# Altium PCB Power.PcbDoc
Units mm, origin at the board's own origin, x right, y up, seen from the top; angles counter-clockwise.
Board outline 108 x 81.48 mm, 4 copper layers (Signal/Power1, GND Signal, GND Power, Signal/Power2), stack 1.56 mm thick; 99 components, 41 nets, 256 pads, 6 vias.
Unrouted connection lines stored in the file: 3.
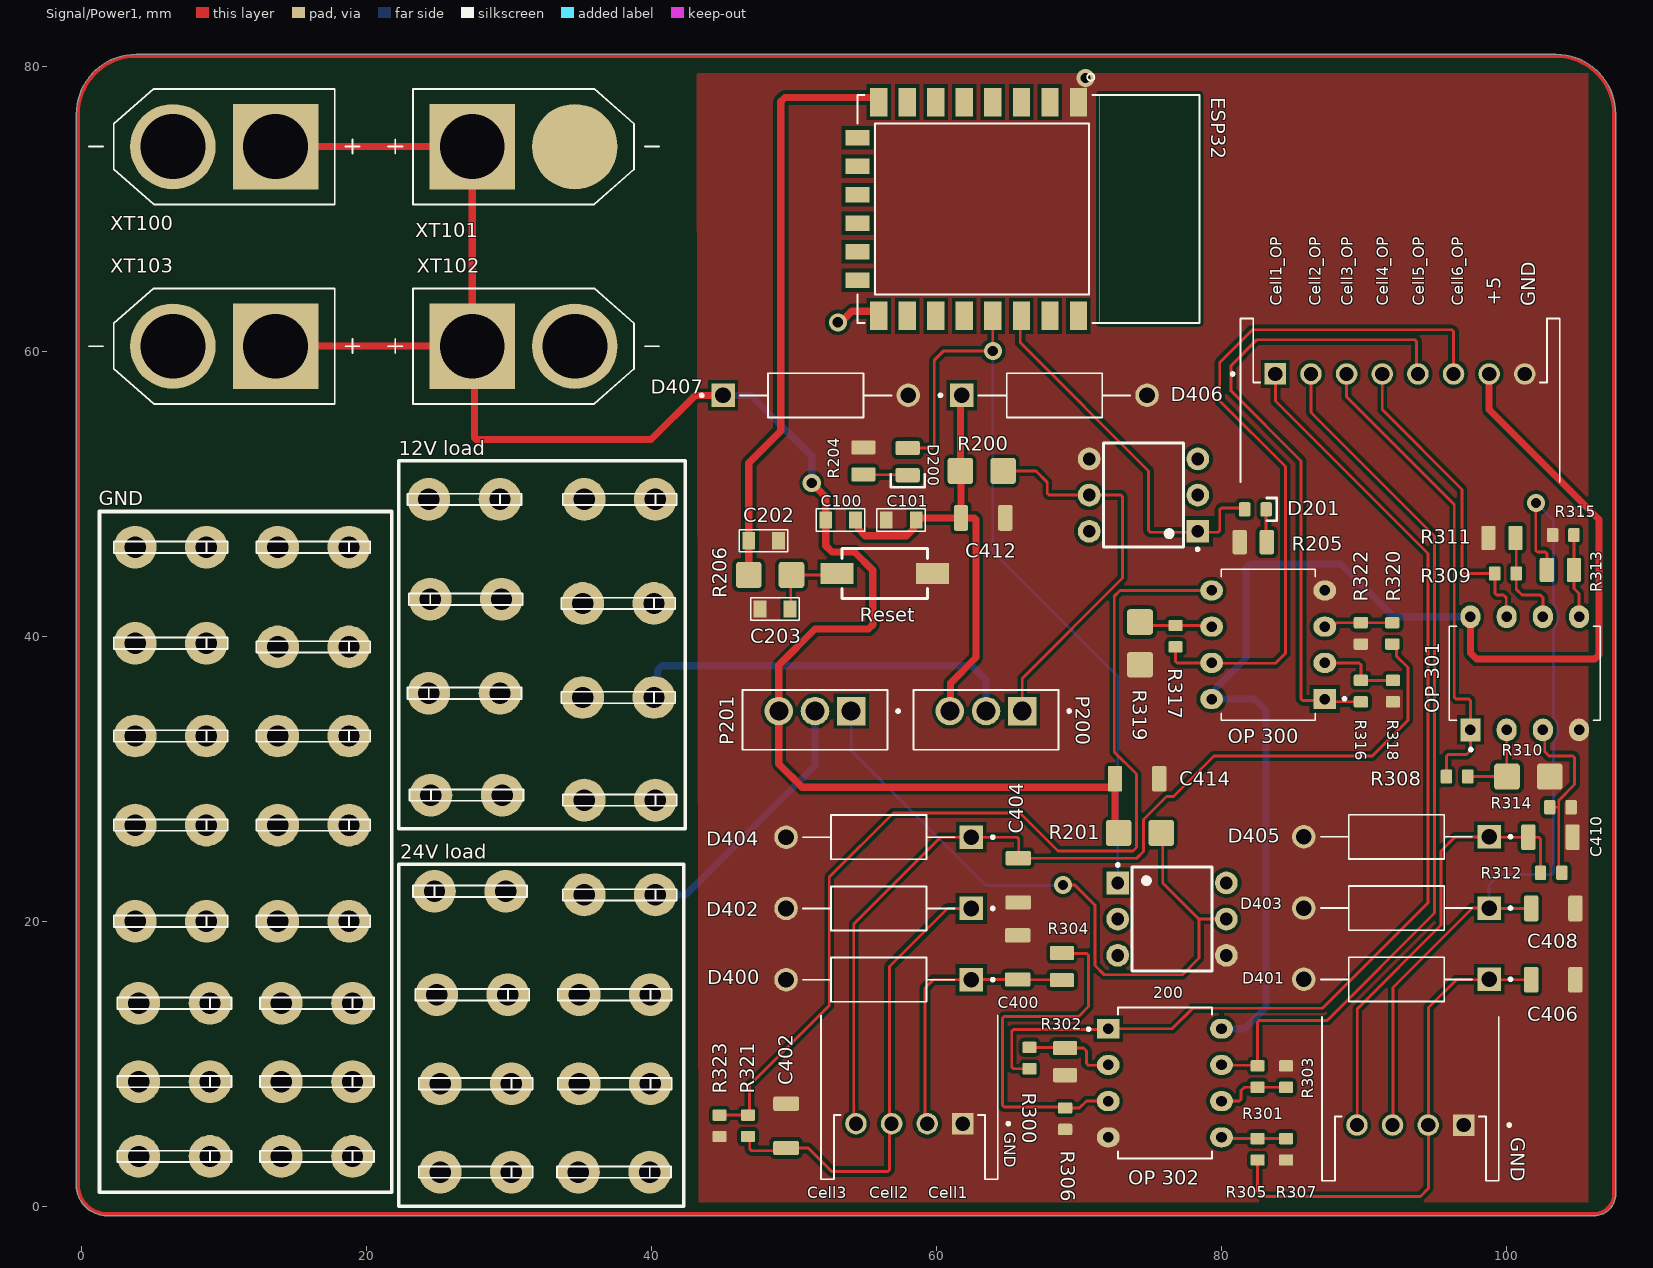
[diagram p0: Signal/Power1 view]
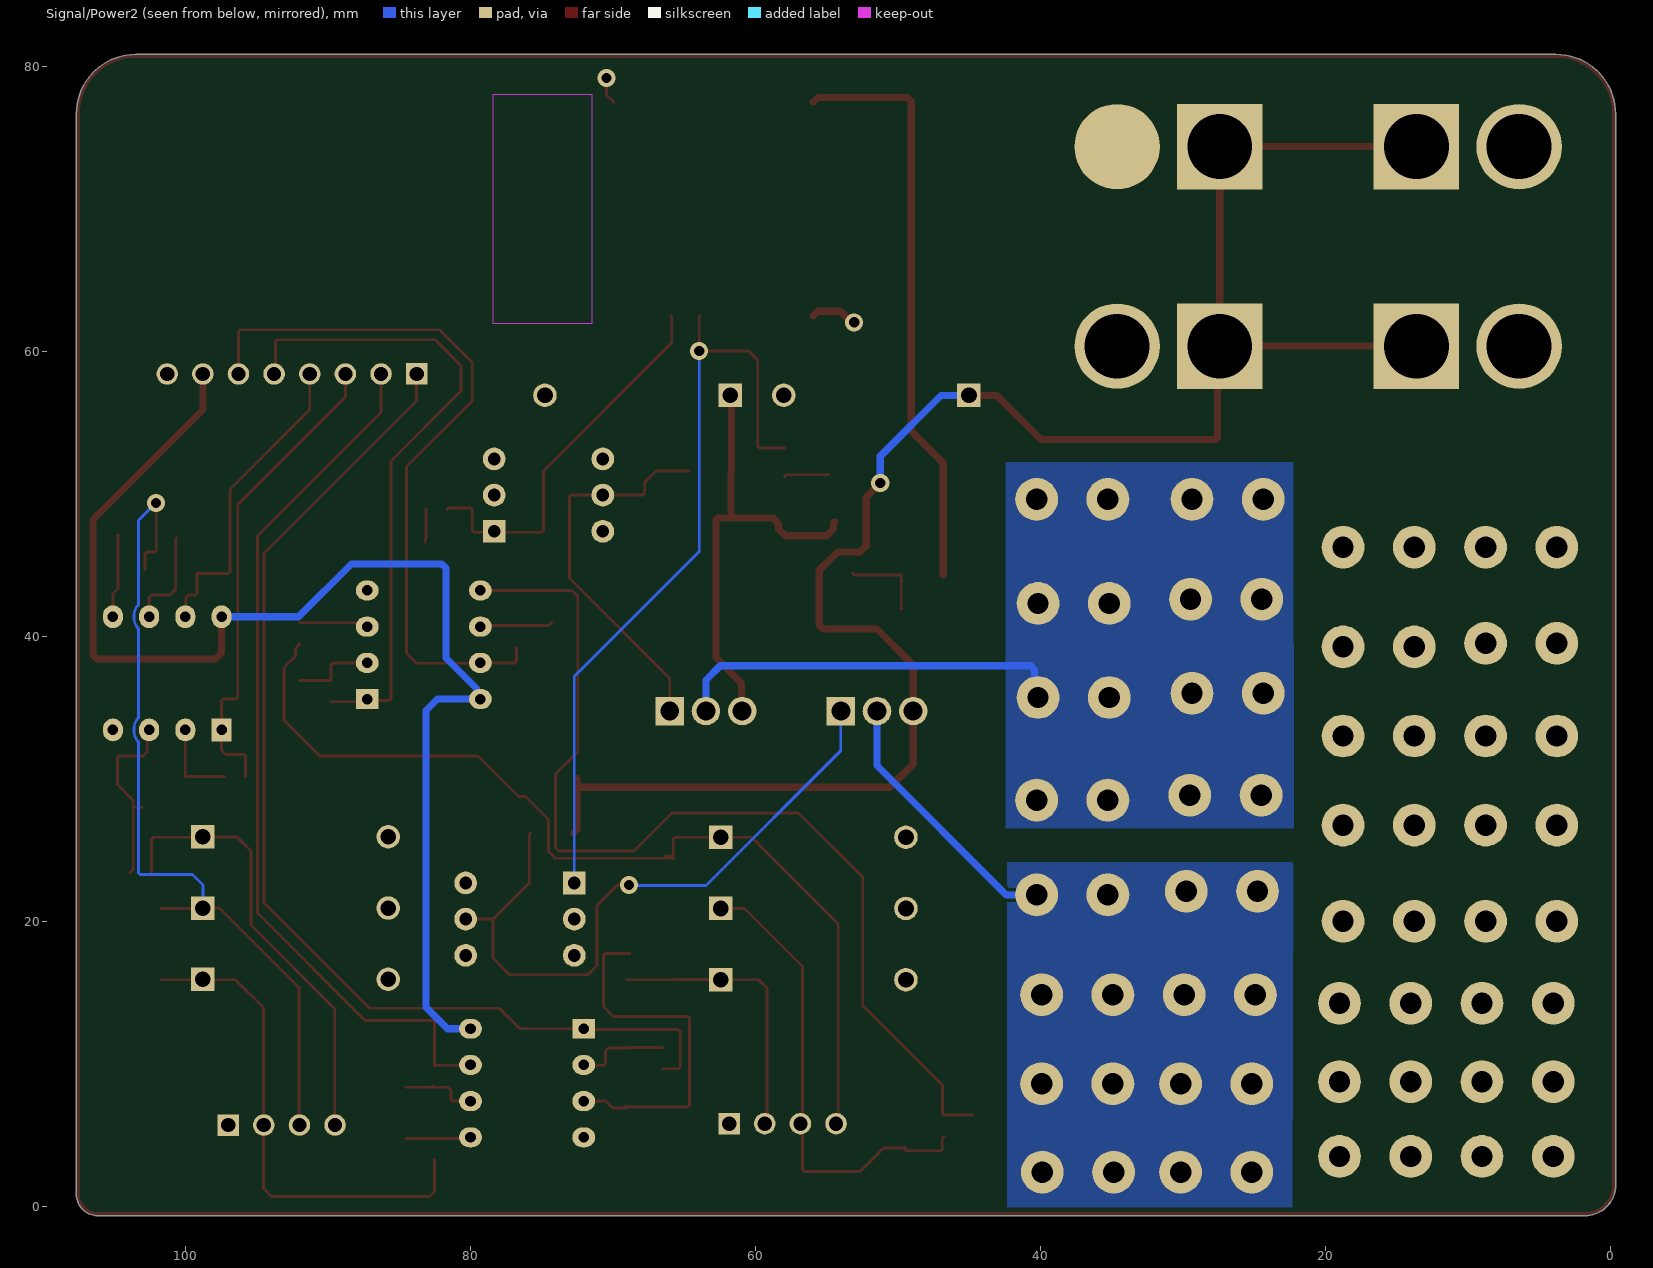
[diagram p1: Signal/Power2 view, seen from below]
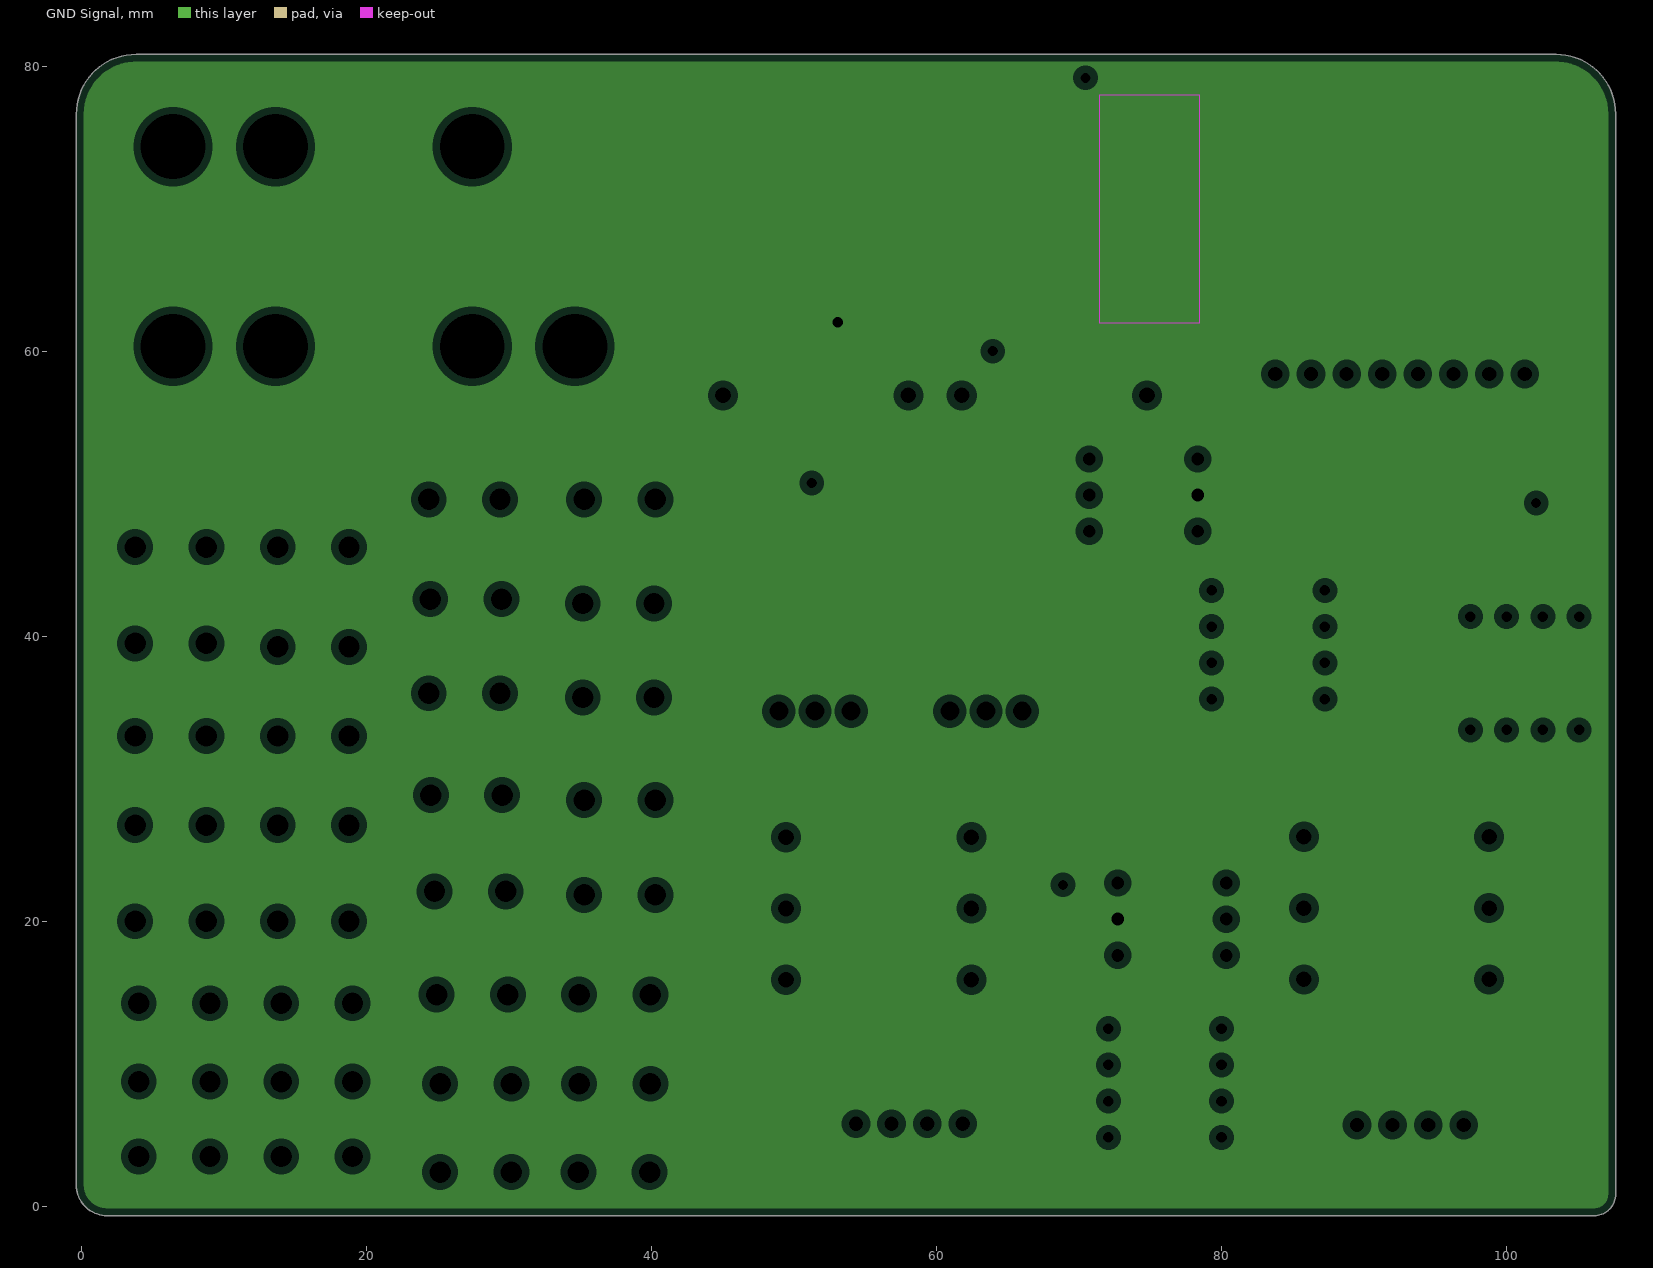
[diagram p2: GND Signal, clearances drawn from the general rule]
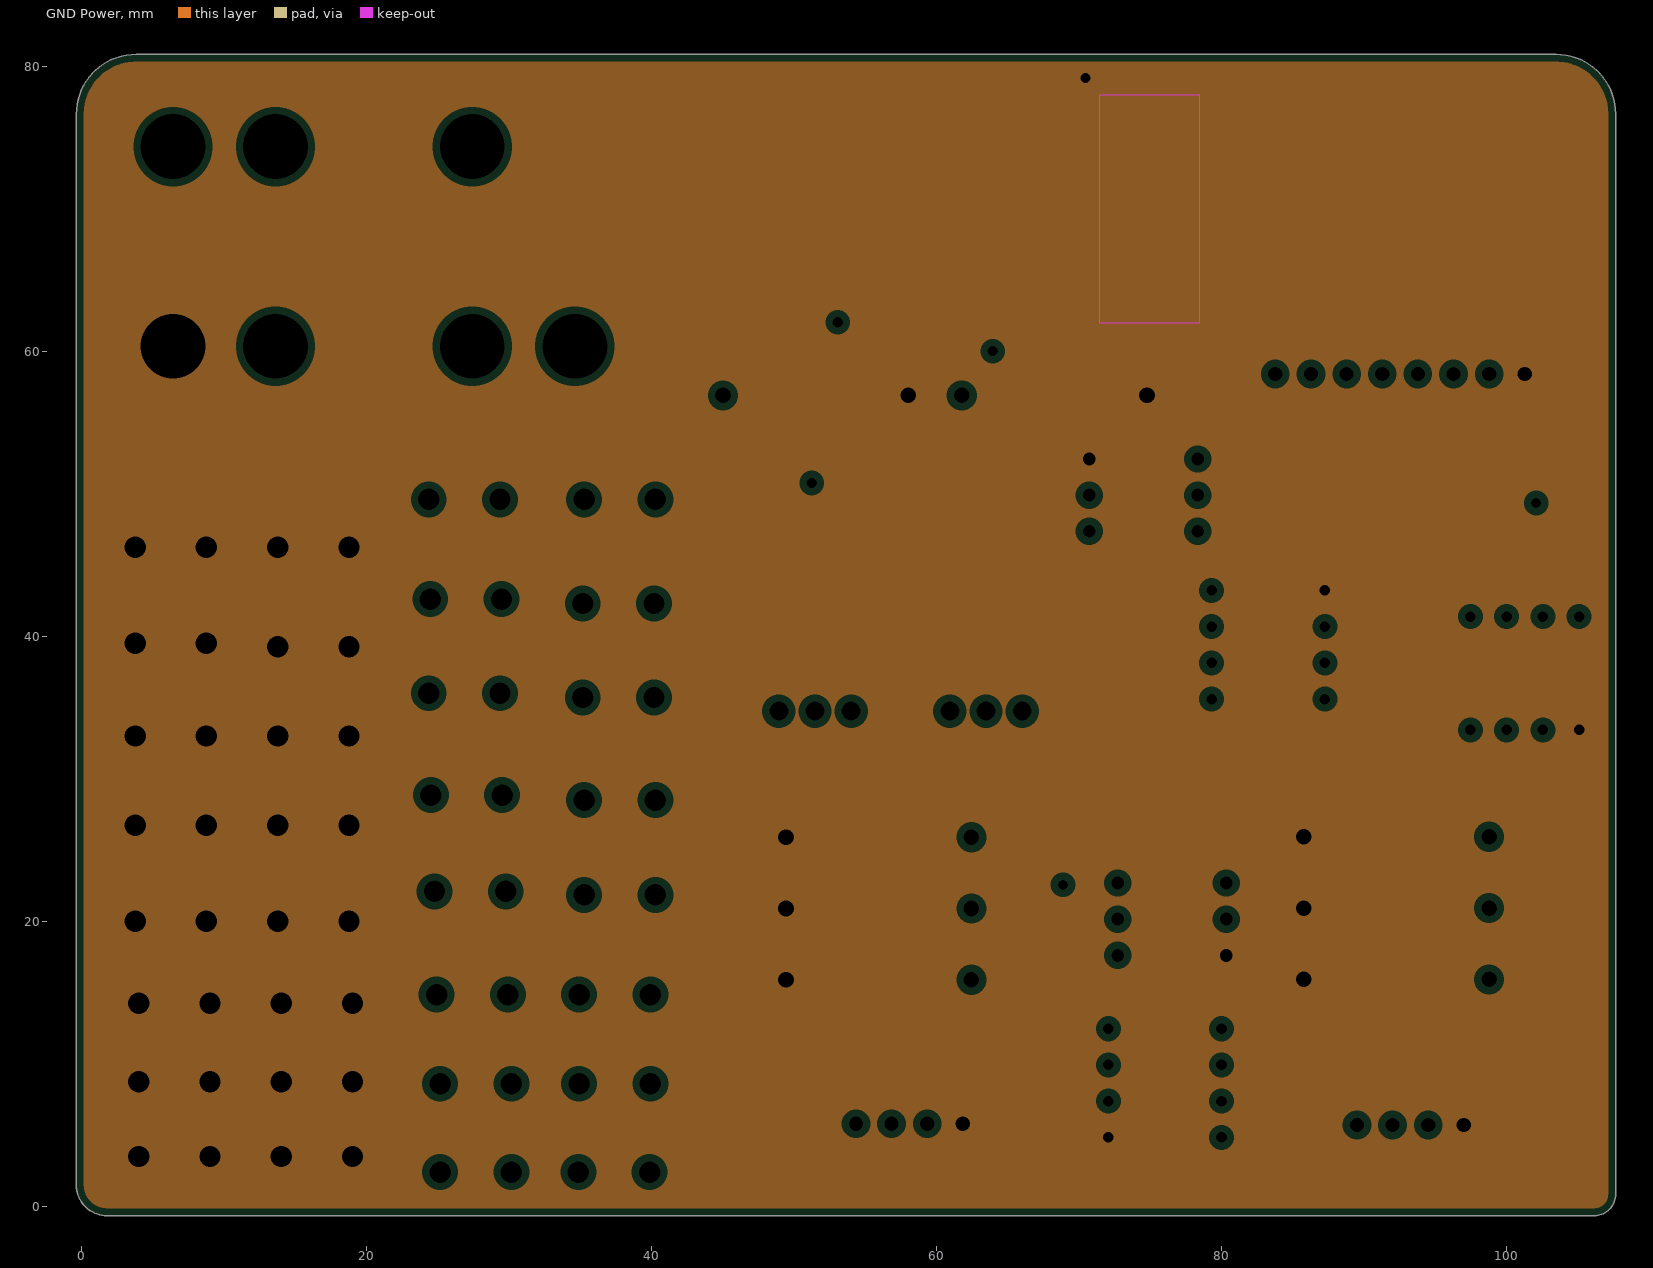
[diagram p3: GND Power, clearances drawn from the general rule]
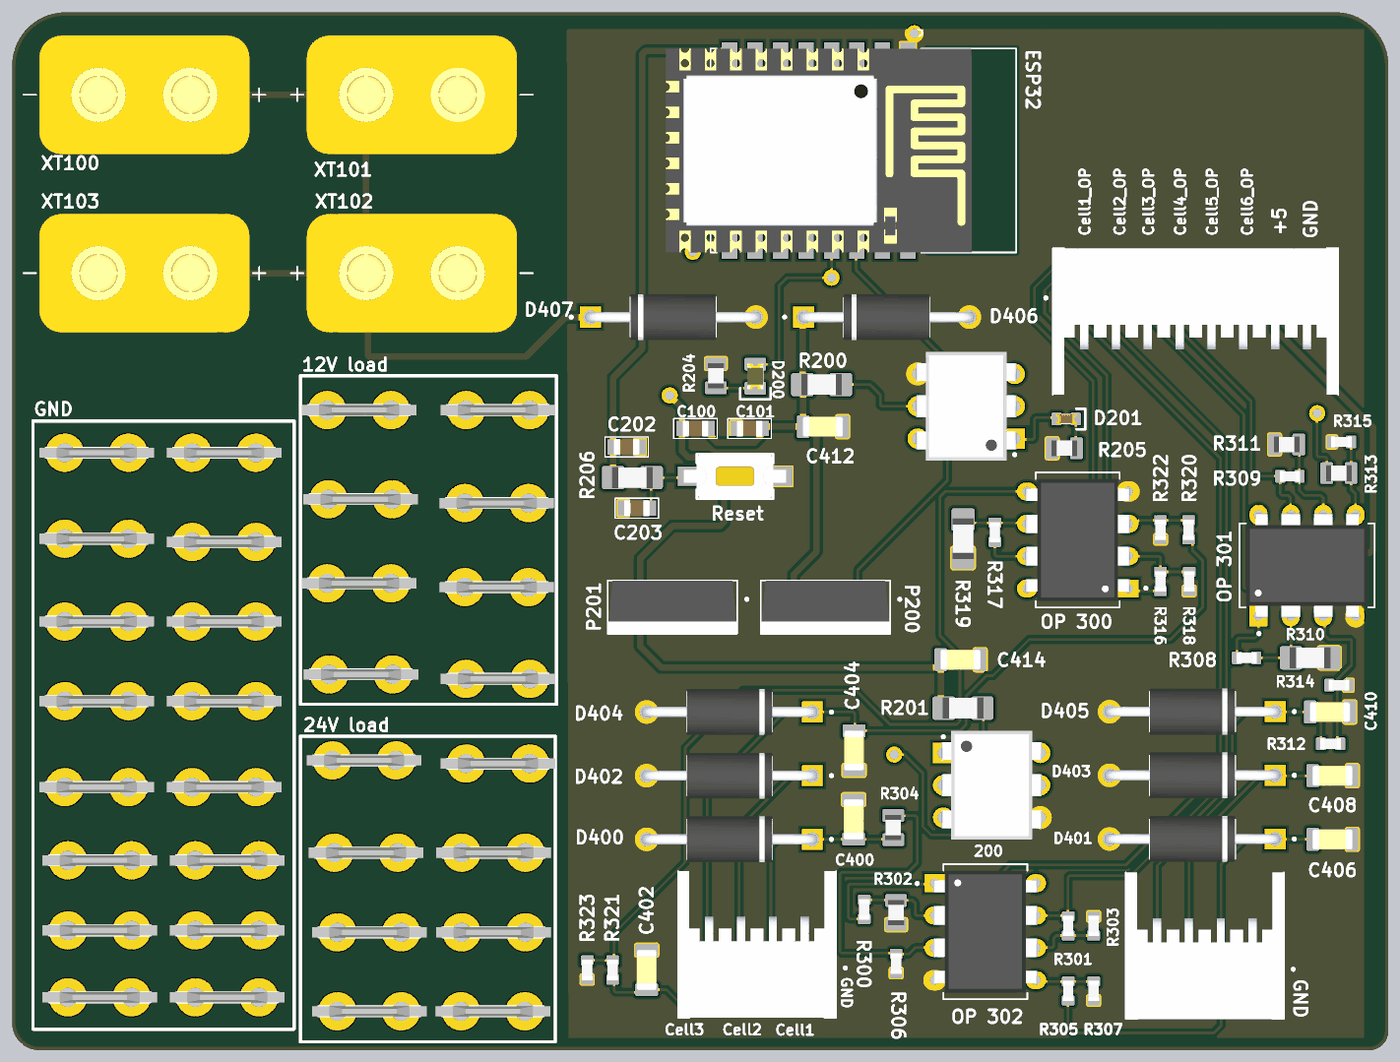
[diagram p4: 3D render of the assembled board from above, using the file's embedded part models]

## Layer stack, top to bottom
Top Solder: solder mask 0.0254, SM-001, Dk 4
Signal/Power1: signal copper 0.035
PP1_2116: prepreg 0.11, PP-017, Dk 4.29
GND Signal: plane copper 0.035, net Signal_GND
C_FR4: core 1.2, Core-039, Dk 4.6
GND Power: plane copper 0.035, net gnd
PP2_2116: prepreg 0.11, PP-017, Dk 4.29
Signal/Power2: signal copper 0.035
Bottom Solder: solder mask 0.0254, SM-001, Dk 4

## Board outline
1.775,-0.652 cw(c1.775,1.5) -0.377,1.5 -0.377,76.632 cw(c3.818,76.632) 3.818,80.827 103.442,80.827 cw(c103.442,76.642) 107.627,76.642 107.627,0.85 cw(c106.125,0.85) 106.125,-0.652

## Design rules (kind name [scope] priority, off if disabled: settings)
Clearance [All] p1: gap=0.254 ignorepadtopadclearanceinfootprint=FALSE
PlaneClearance [All] p1: clearance=0.508
PlaneConnect [All] p1: planeconnectstyle=Relief reliefexpansion=0.508 reliefentries=4 reliefconductorwidth=0.254 reliefairgap=0.254
PolygonConnect PolygonConnect_1 [All vs IsNamedPolygon('NONET_L-01_P-001')] p1: connectstyle=Direct reliefconductorwidth=0.254 reliefentries=4 polygonreliefangle="90 Angle" airgapwidth=0.254
PolygonConnect [All] p2: connectstyle=Relief reliefconductorwidth=0.254 reliefentries=4 polygonreliefangle="90 Angle" airgapwidth=0.254
RoutingVias [All] p1: holewidth=0.3 width=0.7 viastyle="Through Hole" minholewidth=0.25 minwidth=0.6 maxholewidth=0.3 maxwidth=0.7
SolderMaskExpansion [All] p1: expansion=0.102 istentingtop=FALSE
Width [All] p1: maxlimit=0.5 minlimit=0.15 preferedwidth=0.2
28 further rules are at their usual default settings.

## Classes and differential pairs
component class U_4_Protection: C400 C402 C404 C406 C408 C410 C412 C414 D400 D401 D402 D403 D404 D405 D406 D407
component class U_3_BMS: Cell3 GND "OP 300" "OP 301" "OP 302" R300 R301 R302 R303 R304 R305 R306 R307 R308 R309 R310 R311 R312 R313 R314 R315 R316 R317 R318 R319 R320 R321 R322 R323
component class U_2_CircuitBreaker: 200 C202 C203 D200 D201 P200 P201 R200 R201 R204 R205 R206 Reset
component class U_1_Power: C100 C101 XT100 XT101 XT102 XT103

## Components (designator, comment, footprint, x,y, rotation, side; value= is the part's Value field where it differs from the comment)
200 "Optocoupler_4n25" Optocoupler_4n25 76.5,20.15 r0 top (schematic designator *200)
* "Optocoupler_4n25" Optocoupler_4n25 74.5,49.9 r180 top
C100 "100n" C0805 53.25,48.15 r0 top
C101 "100n" C0805 57.5,48.15 r0 top
C202 "100n" C0805 47.85,46.7 r180 top
C203 "100n" C0805 48.65,41.9 r180 top
C400 "2u2" CAP_1206 65.665,17.465 r270 top
C402 "2u2" CAP_1206 49.42,5.65 r270 top
C404 "2u2" CAP_1206 65.7,22.875 r90 top
C406 "2u2" CAP_1206 103.25,15.9 r180 top
C408 "2u2" CAP_1206 103.25,20.9 r180 top
C410 "2u2" CAP_1206 103.05,25.9 r180 top
C412 "2u2" CAP_1206 63.25,48.3 r180 top
C414 "2u2" CAP_1206 74.05,30 r180 top
Cell3 "S4B-XH-A-1" JST_S4B-XH-A-1 58.075,7.65 r180 top (schematic designator J300)
D200 "GREEN" LED_0805_GREEN 57.95,52.25 r90 top
D201 "RED" LED_0603_RED 82.35,48.9 r180 top
D400 "TVS-P6KE400A" TVS 55.92,15.9 r180 top
D401 "TVS-P6KE400A" TVS 92.25,15.925 r180 top
D402 "TVS-P6KE400A" TVS 55.92,20.9 r180 top
D403 "TVS-P6KE400A" TVS 92.25,20.925 r180 top
D404 "TVS-P6KE400A" TVS 55.92,25.9 r180 top
D405 "TVS-P6KE400A" TVS 92.25,25.925 r180 top
D406 "TVS-P6KE400A" TVS 68.25,56.9 r0 top
D407 "TVS-P6KE400A" TVS 51.5,56.9 r0 top
ESP32 "ESP8266-12E/ESP-12E" XCVR_ESP8266-12E/ESP-12E 62.925,69.975 r270 top (schematic designator U200)
GND "S8B-XH-A-1" JST_S8B-XH-A-1 92.5,56.55 r0 top (schematic designator J302)
GND "S4B-XH-A-1" JST_S4B-XH-A-1 93.225,7.55 r180 top (schematic designator J301)
"OP 300" "Opamp_TL072" TL072 83.25,39.4 r180 top
"OP 301" "Opamp_TL072" TL072 101.25,37.4 r90 top
"OP 302" "Opamp_TL072" TL072 76,8.65 r0 top
P200 "P Mosfet" Mosfet 63.45,34.75 r180 top
P201 "P Mosfet" Mosfet 51.45,34.75 r180 top
R200 "10K" RES_1206 63.15,51.6 r0 top
R201 "10K" RES_1206 74.25,26.2 r0 top
R204 "270" RES_0805 54.85,52.3 r90 top
R205 "270" RES_0805 82.2,46.6 r180 top
R206 "10K" RES_1206 48.3,44.3 r180 top
R300 "220K" RES_0603 66.5,10.4 r270 top
R301 "220K" RES_0603 82.5,9.1 r90 top
R302 "470K" RES_0805 69,10.15 r90 top
R303 "680K" RES_0603 84.5,9.1 r90 top
R304 "470K" RES_0805 68.775,16.825 r90 top
R305 "680K" RES_0603 82.5,4 r270 top
R306 "220K" RES_0603 69,6.15 r90 top
R307 "220K" RES_0603 84.5,4 r90 top
R308 "220K" RES_0603 96.5,30.15 r180 top
R309 "220K" RES_0603 99.9,44.4 r180 top
R310 "100K" RES_1206 101.5,30.15 r180 top
R311 "470K" RES_0805 99.65,46.9 r0 top
R312 "3K9" RES_0603 103.1,23.4 r0 top
R313 "470K" RES_0805 103.75,44.65 r0 top
R314 "220K" RES_0603 103.75,28 r180 top
R315 "220K" RES_0603 103.95,47.1 r0 top
R316 "220K" RES_0603 89.75,36.15 r270 top
R317 "220K" RES_0603 76.75,40 r270 top
R318 "680K" RES_0603 92,36.15 r270 top
R319 "100K" RES_1206 74.25,39.5 r90 top
R320 "680K" RES_0603 91.95,40.2 r270 top
R321 "3K9" RES_0603 46.75,5.65 r90 top
R322 "220K" RES_0603 89.75,40.2 r90 top
R323 "220K" RES_0603 44.75,5.65 r90 top
Reset "" 434121043816 56.35,44.4 r0 top (schematic designator SW200)
T100 "Terminal pin 6.3mm" "Terminal pin 6.3mm" 37.75,49.6 r180 top
T101 "Terminal pin 6.3mm" "Terminal pin 6.3mm" 37.4,8.6 r180 top
T102 "Terminal pin 6.3mm" "Terminal pin 6.3mm" 27.65,8.6 r180 top
T103 "Terminal pin 6.3mm" "Terminal pin 6.3mm" 27.4,14.85 r180 top
T104 "Terminal pin 6.3mm" "Terminal pin 6.3mm" 37.35,2.4 r180 top
T105 "Terminal pin 6.3mm" "Terminal pin 6.3mm" 27.65,2.4 r180 top
T106 "Terminal pin 6.3mm" "Terminal pin 6.3mm" 37.4,14.85 r180 top
T109 "Terminal pin 6.3mm" "Terminal pin 6.3mm" 26.85,49.6 r180 top
T112 "Terminal pin 6.3mm" "Terminal pin 6.3mm" 27,28.85 r0 top
T113 "Terminal pin 6.3mm" "Terminal pin 6.3mm" 27.25,22.1 r0 top
T115 "Terminal pin 6.3mm" "Terminal pin 6.3mm" 26.95,42.6 r0 top
T116 "Terminal pin 6.3mm" "Terminal pin 6.3mm" 26.85,36 r0 top
T118 "Terminal pin 6.3mm" "Terminal pin 6.3mm" 37.65,35.7 r180 top
T119 "Terminal pin 6.3mm" "Terminal pin 6.3mm" 37.65,42.3 r180 top
T121 "Terminal pin 6.3mm" "Terminal pin 6.3mm" 37.75,28.5 r180 top
T122 "Terminal pin 6.3mm" "Terminal pin 6.3mm" 37.75,21.85 r180 top
T124 "Terminal pin 6.3mm" "Terminal pin 6.3mm" 16.25,20 r180 top
T125 "Terminal pin 6.3mm" "Terminal pin 6.3mm" 6.5,14.25 r180 top
T126 "Terminal pin 6.3mm" "Terminal pin 6.3mm" 16.25,26.75 r180 top
T127 "Terminal pin 6.3mm" "Terminal pin 6.3mm" 6.25,39.5 r180 top
T128 "Terminal pin 6.3mm" "Terminal pin 6.3mm" 6.25,46.25 r180 top
T129 "Terminal pin 6.3mm" "Terminal pin 6.3mm" 16.5,3.5 r180 top
T129 "Terminal pin 6.3mm" "Terminal pin 6.3mm" 16.5,8.75 r180 top
T130 "Terminal pin 6.3mm" "Terminal pin 6.3mm" 6.5,3.5 r180 top
T130 "Terminal pin 6.3mm" "Terminal pin 6.3mm" 6.5,8.75 r180 top
T131 "Terminal pin 6.3mm" "Terminal pin 6.3mm" 6.25,33 r180 top
T132 "Terminal pin 6.3mm" "Terminal pin 6.3mm" 6.25,26.75 r180 top
T133 "Terminal pin 6.3mm" "Terminal pin 6.3mm" 6.25,20 r180 top
T134 "Terminal pin 6.3mm" "Terminal pin 6.3mm" 16.5,14.25 r180 top
T135 "Terminal pin 6.3mm" "Terminal pin 6.3mm" 16.25,46.25 r180 top
T136 "Terminal pin 6.3mm" "Terminal pin 6.3mm" 16.25,39.25 r180 top
T137 "Terminal pin 6.3mm" "Terminal pin 6.3mm" 16.25,33 r180 top
XT100 "XT60-Male" XT60-Male#1 10,74.35 r180 top
XT101 "XT60-Male" XT60-Male#2 31,74.35 r0 top
XT102 "XT60-Male" XT60-Male#1 31,60.35 r0 top
XT103 "XT60-Male" XT60-Male#1 10,60.35 r180 top

## Footprints (in the part's own frame and the unit in brackets; to place one, negate y for a bottom-side part, rotate by r counter-clockwise, add the part's x,y. Pads: shape width x height; smd on the part's side, far side on the other; paste and mask are expansions set on the pad)
434121043816 [mm] "SMD Tact Switch, body 6x3.5mm"
  rect 2.3x1.5 smd: 1(-3.35,0) 2(3.35,0)
  silkscreen extent -3,-1.75 3,1.75, body extent -4,-1.75 4,1.75, height 4.3
C0805 [mm]
  rect 0.9x1.2 smd: 1(-1.05,0) 2(1.05,0)
  silkscreen extent -1.7,-0.79 1.7,0.79, body extent -1,-0.63 1,0.63, height 1.36
CAP_1206 [mm]
  rrect25% 1x1.8 smd: 1(-1.55,0) 2(1.55,0)
  body extent -1.6,-0.8 1.6,0.8, height 0.94
JST_S4B-XH-A-1 [mm]
  rect 1.508x1.508 / inner round 1.508 / far side rect 1.508x1.508 hole 1: 1(-3.75,1.85)
  round 1.508 hole 1: 2(-1.25,1.85) 3(1.25,1.85) 4(3.75,1.85)
  silkscreen extent -7.04,-5.75 6.2,5.75, body extent -6.2,-5.75 6.2,5.75, height 6.1
JST_S8B-XH-A-1 [mm]
  rect 1.508x1.508 / inner round 1.508 / far side rect 1.508x1.508 hole 1: 1(-8.75,1.85)
  round 1.508 hole 1: 2(-6.25,1.85) 3(-3.75,1.85) 4(-1.25,1.85) 5(1.25,1.85) 6(3.75,1.85) 7(6.25,1.85) 8(8.75,1.85)
  silkscreen extent -11.85,-5.75 11.2,5.75, body extent -11.2,-5.75 11.2,5.75, height 6.1
LED_0603_RED [mm]
  rrect25% 0.8x1 smd: A(0.75,0) K(-0.75,0)
  silkscreen extent -1.5,-0.8 -0.8,0.8, body extent -0.8,-0.4 0.8,0.4, height 0.6
LED_0805_GREEN [mm]
  rrect25% 1x1.7 smd: A(0.95,0) K(-0.95,0)
  silkscreen extent -1.8,-1.2 -0.9,1.2, body extent -1,-0.63 1,0.63, height 1.12
Mosfet [mm]
  rect 2x2 / inner round 2 / far side rect 2x2 hole 1.33: 1(-2.54,0)
  round 2 hole 1.33: 2(0,0) 3(2.54,0)
  silkscreen extent -5.93,-1.48 5.08,2.72, body extent -5.08,-1.47 5.08,2.72, height 20.56
Optocoupler_4n25 [mm]
  rect 1.6x1.6 hole 0.9: 1(-3.81,2.54)
  round 1.6 hole 0.9: 2(-3.81,0) 3(-3.81,-2.54) 4(3.81,-2.54) 5(3.81,0) 6(3.81,2.54)
  silkscreen extent -3.9,-3.65 2.8,3.9, body extent -3.94,-4.26 3.94,4.26, height 3.54
RES_0603 [mm]
  rrect25% 0.8x1 smd: 1(-0.75,0) 2(0.75,0)
  body extent -0.8,-0.43 0.8,0.43, height 0.52
RES_0805 [mm]
  rrect25% 1x1.7 smd: 1(-0.95,0) 2(0.95,0)
  body extent -1,-0.63 1,0.63, height 0.47
RES_1206 [mm]
  rrect25% 1.8x1.84 smd: 1(-1.5,0) 2(1.5,0)
  body extent -1.6,-0.83 1.6,0.83, height 0.57
"Terminal pin 6.3mm" [mm]
  round 3 hole 1.5: 1(-2.5,0) 2(2.5,0)
  silkscreen extent -4,-0.4 4,0.4, body extent -4.5,-0.4 4.5,0.4, height 10
TL072 [mm]
  rect 1.6x1.4 hole 0.74: 1(-3.97,3.81)
  oval 1.6x1.4 hole 0.74: 2(-3.97,1.27) 3(-3.97,-1.27) 4(-3.97,-3.81) 5(3.97,-3.81) 6(3.97,-1.27) 7(3.97,1.27) 8(3.97,3.81)
  silkscreen extent -5.45,-5.3 3.3,5.3, body extent -4.1,-4.79 4.1,4.79, height 4.58
TVS [mm]
  round 1.65 hole 1.1: A(6.5,0)
  rect 1.65x1.65 / inner round 1.65 / far side rect 1.65x1.65 hole 1.1: C(-6.5,0)
  silkscreen extent -8.1,-1.55 5.32,1.55, body extent -6.9,-1.8 6.9,1.8, height 3.6
XCVR_ESP8266-12E/ESP-12E [mm]
  rect 2x1.2 smd: 1(-7.5,7) 2(-7.5,5) 3(-7.5,3) 4(-7.5,1) 5(-7.5,-1) 6(-7.5,-3) 7(-7.5,-5) 8(-7.5,-7) 15(7.5,-7) 16(7.5,-5) 17(7.5,-3) 18(7.5,-1) 19(7.5,1) 20(7.5,3) 21(7.5,5) 22(7.5,7)
  rect 1.1x1.7 smd: 9(-5,-8.5) 10(-3,-8.5) 11(-1,-8.5) 12(1,-8.5) 13(3,-8.5) 14(5,-8.5)
  Keep-Out Layer region: 8,8.51 -8.009,8.51 -8.009,15.5 8,15.5
  Keep-Out Layer region: 8,8.51 -8.009,8.51 -8.009,15.5 8,15.5
  silkscreen extent -9.5,-8.5 8,15.5, body extent -8,-12 8,12, height 3
XT60-Male#1 [mm]
  round 6 hole 4.55: N(3.6,0)
  rect 6x6 / inner round 6 / far side rect 6x6 hole 4.55: P(-3.6,0)
  silkscreen extent -9.5,-4.05 9.5,4.05, body extent -8.25,-4.65 8.25,4.65, height 15.8
XT60-Male#2 [mm]
  round 6 all layers, no hole: N(3.6,0)
  rect 6x6 / inner round 6 / far side rect 6x6 hole 4.55: P(-3.6,0)
  silkscreen extent -9.5,-4.05 9.5,4.05, body extent -8.25,-4.65 8.25,4.65, height 15.8

## Part data
C100 C101 C202 C203: library part C0805
C400 C402 C404 C406 C408 C410 C412 C414: library part CAP_1206, "Capacitor SMD 1206"
Cell3 GND: "Connector Header Through Hole, Right Angle 4 position 0.098 (2.50mm)", Package=None, Check_prices=https://www.snapeda.com/parts/S4B-XH-A-1/JST+Sales+America+Inc./view-part/?ref=eda, MF="JST Sales", MP=S4B-XH-A-1, SnapEDA_Link=https://www.snapeda.com/parts/S4B-XH-A-1/JST+Sales+America+Inc./view-part/?ref=snap
D200: library part LED_0805_GREEN, "LED 0805 GREEN SMD"
D201: library part LED_0603_RED, "LED 0603 RED SMD"
ESP32: "This WiFi module has a 32-bit MCU micro and clock speeds supporting 80 MHz or 160 MHz. Supports the RTOS and integrated Wi-Fi MAC/BB/RF/PA/LNA, and has an on-board antenna.", Package=None, Availability="Not in stock", Check_prices=https://www.snapeda.com/parts/ESP8266-12E/ESP-12E/AI-Thinker/view-part/?ref=eda, MF=AI-Thinker, MP=ESP8266-12E/ESP-12E, Price=None, SnapEDA_Link=https://www.snapeda.com/parts/ESP8266-12E/ESP-12E/AI-Thinker/view-part/?ref=snap
GND: "Connector Header Through Hole, Right Angle 8 position 0.098 (2.50mm)", Package=None, Check_prices=https://www.snapeda.com/parts/S8B-XH-A-1/JST+Sales+America+Inc./view-part/?ref=eda, MF="JST Sales", MP=S8B-XH-A-1, SnapEDA_Link=https://www.snapeda.com/parts/S8B-XH-A-1/JST+Sales+America+Inc./view-part/?ref=snap
R200 R201 R206 R310 R319: library part RES_1206, "Resistor SMD 1206"
R204 R205 R302 R304 R311 R313: library part RES_0805, "Resistor SMD 0805"
R300 R301 R303 R305 R306 R307 R308 R309 R312 R314 R315 R316 R317 R318 R320 R321 R322 R323: library part RES_0603, "Resistor SMD 0603"
Reset: library part CMP-1459-00005-3, "Switch Tactile Spst-no 0.05A 12V", Contact Current Rating=50mA, Contact Resistance=100mΩ, Insulation Resistance=100MΩ, Max Operating Temperature=85°C, Min Operating Temperature=-40°C, Operating Force=160N, Voltage Rating=12V, Contact Plating=Silver, Current Rating=50mA, Height=4.3mm, Packaging="Tape and Reel", RoHS=Compliant, Width=6mm
XT100 XT101 XT102 XT103: "Plug; DC supply; XT60; male; PIN: 2; for cable; soldered; 30A; 500V", Package=Package, Availability="Not in stock", Check_prices=https://www.snapeda.com/parts/XT60-M/AMASS/view-part/?ref=eda, MF=AMASS, MP=XT60-M, Price=None, SnapEDA_Link=https://www.snapeda.com/parts/XT60-M/AMASS/view-part/?ref=snap

## Via types
v1: diameter 1.27, hole 0.711, Signal/Power1 to Signal/Power2, 6 vias

## Nets (pads, with @x,y where several pads share a name; then routed paths per layer and width w, separated by ;. In a path a pad name is that pad's centre, name@x,y a point inside that pad or via, vN(x,y) a via of type N, cw(c..) or ccw(c..) an arc to the next point about the centre after c; other vN are vias at no path point)
12V_Signal: *.1 D201.A ESP32.20 | length 27.2
  Signal/Power1 w0.2: ESP32.20 65.85,62.4 65.85,60.6 74.85,51.6 74.85,47.417 74.967,47.3 *.1@78.31,47.3 ; *.1@78.38,47.29 79.733,47.29 79.85,47.407 79.85,48.883 79.967,49 81.5,49 D201.A
24V_Signal: 200.1 D200.A ESP32.19 | length 55.3
  Signal/Power1 w0.2: D200.A 59.7,53.2 59.817,53.317 59.817,59.367 60.45,60 v1(63.925,60) ; v1@63.925,60.592 ESP32.19
  Signal/Power2 w0.2: v1@63.85,60.1 63.925,60.025 v1(63.925,60) 63.925,45.933 72.69,37.168 200.1
+3V3: C202.2 ESP32.8 R206.2 | length 41.2
  Signal/Power1 w0.5: R206.2 C202.2 ; C202.2@46.8,46.775 46.8,52.15 49.05,54.4 49.05,77.507 49.343,77.8 55.6,77.8 ESP32.8
+5: "OP 300.8" "OP 301.8" "OP 302.8" GND.7 | length 91
  Signal/Power1 w0.2: 97.44,41.29 97.45,41.3
  Signal/Power1 w0.5: 97.44,41.29 97.44,38.827 97.867,38.4 106.157,38.4 106.45,38.693 106.45,48.2 98.75,55.9 GND.7
  Signal/Power2 w0.5: 79.97,12.46 81.585,12.46 83.09,13.965 83.09,34.785 82.285,35.59 79.28,35.59 79.552,35.862 79.552,36.327 81.7,38.475 81.7,44.782 81.993,45.075 88.325,45.075 92.03,41.37 97.44,41.37
+12_unfiltered: C100.2 C101.2 C412.2 D406.C P200.3 R200.1 | length 32.7
  Signal/Power1 w0.2: C100.2 C100.2@54.45,48 ; C101.2 C101.2@58.7,48.3
  Signal/Power1 w0.5: C100.2@54.45,48 54.5,47.95 54.5,47.518 54.972,47.046 57.878,47.046 58.35,47.518 58.35,47.9 C101.2@58.55,48.1 ; C101.2@58.7,48.3 C412.2 ; P200.3@60.95,34.8 60.95,36.7 62.75,38.5 62.75,48.183 62.633,48.3 C412.2 ; D406.C 61.65,56.8 R200.1 61.7,51.55 C412.2
+12V_Load: P200.2 T100.1 T100.2 T109.1 T109.2 T112.1 T112.2 T115.1 T115.2 T116.1 T116.2 T118.1 T118.2 T119.1 T119.2 T121.1 T121.2 | length 28.2
  Signal/Power2 w0.2: P200.2@63.1,35.1 P200.2@63.5,35.1
  Signal/Power2 w0.5: T118.1 40.392,35.942 40.392,37.64 40.685,37.933 62.442,37.933 63.45,36.925 63.45,35.1 P200.2
+24_unfiltered: C100.1 C414.2 D407.C P201.3 R201.1 XT100.N XT100.P XT101.P XT102.N XT102.P XT103.P | length 132.3
  Signal/Power1 w0.2: XT103.P@13.65,60.1 XT103.P@13.9,60.35 ; XT100.P@13.85,74.1 XT100.P@14.1,74.35 ; XT102.P@27.15,60.2 XT102.P@27.55,59.8 ; XT101.P@27.4,73.95 XT101.P@27.45,74 ; R201.1@72.6,26.55 72.75,26.4 R201.1
  Signal/Power1 w0.5: XT103.P@13.9,60.35 XT102.P XT101.P@27.4,73.95 ; XT100.P@14.1,74.35 XT101.P ; XT102.P@27.55,59.8 27.55,53.917 27.667,53.8 39.95,53.8 43.05,56.9 D407.C ; v1(51.225,50.75) 52.2,49.775 C100.1 52.2,46.35 52.65,45.9 54.225,45.9 55.5,44.625 55.5,40.793 55.207,40.5 51.45,40.5 48.91,37.96 P201.3 48.91,31.04 50.55,29.4 72.25,29.4 C414.2@72.5,29.65 ; C414.2 C414.2@72.5,29.65 ; R201.1 72.5,26.45 C414.2@72.5,29.65
  Signal/Power2 w0.5: D407.C 46.95,56.9 51.225,52.625 v1(51.225,50.75)
+24V_Load: P201.2 T101.1 T101.2 T102.1 T102.2 T103.1 T103.2 T104.1 T104.2 T105.1 T105.2 T106.1 T106.2 T113.1 T113.2 T122.1 T122.2 | length 18.8
  Signal/Power2 w0.5: T122.1 42.375,21.85 51.45,30.925 P201.2
"cell 1": C400.2 Cell3.2 D400.C R304.1 | length 19.6
  Signal/Power1 w0.2: Cell3.2 59.17,5.955 59.17,15.32 59.75,15.9 D400.C D400.C@62.5,15.9 ; D400.C@62.5,15.915 C400.2@65.64,15.915 ; C400.2 65.685,15.895 68.995,15.895 R304.1@69,15.9
"cell 1 input +": "OP 302.3" R304.2 R306.2 | length 25.7
  Signal/Power1 w0.2: R304.2 68.8,17.75 70.533,17.75 70.65,17.633 70.65,14.025 69.95,13.325 64.717,13.325 64.6,13.208 64.6,7.08 64.717,6.963 68.988,6.963 R306.2@69.05,7.025 ; R306.2@69.05,6.9 69.988,6.9 70.488,7.4 72,7.4
"cell 1 input -": "OP 302.2" R300.1 R302.2 | length 6.5
  Signal/Power1 w0.2: R300.1 R302.2@69,11.15 ; R302.2 70.3,11.1 70.5,10.9 70.5,10.017 70.617,9.9 72,9.9
"cell 1 output": "OP 302.1" GND.1@83.75,58.4 R300.2 | length 78.2
  Signal/Power1 w0.2: R300.2 65.367,9.65 65.25,9.767 65.25,12.283 65.367,12.4 72,12.4 ; 72.03,12.46 76.51,12.46 77.95,13.9 87.05,13.9 94.45,21.3 94.45,45.8 83.75,56.5 GND.1@83.75,58.4
"cell 2": C402.2 Cell3.3 D402.C R321.1 | length 33.5
  Signal/Power1 w0.2: R321.1 46.875,4.775 46.875,4.017 46.992,3.9 49.375,3.9 C402.2@49.497,4.022 ; C402.2 49.497,4.1 50.975,4.1 52.625,2.45 56.558,2.45 56.675,2.567 56.675,5.65 Cell3.3 56.67,5.955 56.67,16.82 60.75,20.9 D402.C
"cell 2 input +": "OP 302.5" R305.1 R307.2 | length 4.6
  Signal/Power1 w0.2: 79.97,4.84 80.06,4.75 R307.2
"cell 2 input -": "OP 302.6" R301.1 R303.1 | length 5.2
  Signal/Power1 w0.2: 79.95,7.4 81.233,7.4 81.35,7.517 81.35,8.122 81.578,8.35 R301.1 ; R301.1@82.6,8.45 82.7,8.35 R303.1
"cell 2 output": "OP 302.7" GND.2@86.25,58.4 R301.2 | length 62.4
  Signal/Power1 w0.2: 80.15,9.9 82.45,9.9 R301.2 82.5,12.933 82.617,13.05 87.4,13.05 94.925,20.575 94.925,47.025 86.25,55.7 GND.2@86.25,58.3
"cell 2_f": C406.2 D401.C GND.2@94.475,5.7 R305.2 | length 35.3
  Signal/Power1 w0.2: R305.2 82.5,1.05 82.85,0.7 93.933,0.7 94.5,1.267 94.5,5.675 94.475,5.7 94.5,5.725 94.5,13.95 96.45,15.9 98.725,15.9 D401.C ; D401.C@98.75,15.9 C406.2
"cell 3": C404.2 Cell3.4 D404.C R320.2 | length 68.4
  Signal/Power1 w0.2: Cell3.4 54.17,5.955 54.17,19.82 60.25,25.9 D404.C 65.633,25.9 65.75,25.783 65.75,24.6 C404.2@66.275,24.6 ; C404.2 74.025,24.425 74.496,24.896 74.496,27.135 76.107,28.746 76.596,28.746 79.45,31.6 90.55,31.6 93.05,34.1 93.05,37.8 92.25,38.6 92.25,39.15 R320.2
"cell 3 input +": "OP 301.3" R312.2 R314.2 | length 13.1
  Signal/Power1 w0.2: 102.52,33.43 102.65,33.3 102.65,31.9 102.95,31.6 104.633,31.6 104.75,31.483 104.75,29.592 103.629,28.471 103.629,28 ; R314.2 103.629,28 ; R312.2 103.629,23.621 103.629,28
"cell 3 input -": "OP 301.2" R308.1 R310.2 | length 6
  Signal/Power1 w0.2: R308.1 99.9,30.15 R310.2@99.95,30.2 ; R310.2 99.98,30.17 99.98,33.33 100.05,33.4
"cell 3 output": "OP 301.1" GND.3@88.75,58.4 R308.2 | length 33.8
  Signal/Power1 w0.2: GND.3@88.75,58.4 88.75,56.8 96.3,49.25 96.3,35.717 96.417,35.6 97.323,35.6 97.44,35.483 97.44,33.43 ; R308.2 95.75,31.583 95.867,31.7 97.15,31.7 97.45,32 97.45,33.4
"cell 3_f": C410.2 D405.C GND.4@89.475,5.7 R312.1 | length 31.3
  Signal/Power1 w0.2: GND.4@89.475,5.7 89.5,5.725 89.5,13.85 95.379,19.729 95.379,24.929 96.375,25.925 D405.C 98.775,25.9 C410.2@101.35,25.9 ; C410.2 102.233,25.9 102.35,25.783 R312.1
"cell 4 input +": "OP 301.5" R313.2 R315.2 | length 5.8
  Signal/Power1 w0.2: R315.2 R313.2 104.7,43.35 105.05,43 105.05,41.4
"cell 4 input -": "OP 301.6" R309.1 R311.2 | length 7.1
  Signal/Power1 w0.2: R311.2 100.65,46.85 R309.1 100.65,43.3 101.05,42.9 102.333,42.9 102.52,42.713 102.52,41.47 102.45,41.4
"cell 4 output": "OP 301.7" GND.4@91.25,58.4 R309.2 | length 22.2
  Signal/Power1 w0.2: GND.4@91.25,58.4 91.25,55.9 96.85,50.3 96.85,44.517 96.967,44.4 R309.2 99.15,43.017 99.267,42.9 99.75,42.9 99.95,42.7 99.95,41.4
"cell 4_f": C408.2 D403.C GND.3@91.975,5.7 R313.1 | length 60.2
  Signal/Power1 w0.2: GND.3@91.975,5.7 92,5.725 92,15.35 97.575,20.925 D403.C ; D403.C@98.75,20.9 C408.2 ; v1@102.025,49.275 102.025,46.024 102.142,45.907 102.683,45.907 102.8,45.79 R313.1
  Signal/Power2 w0.2: D403.C 98.75,22.55 99.475,23.275 103.158,23.275 103.275,23.392 103.275,32.595 ccw(c102.52,33.33) 103.574,33.33 103.574,33.53 ccw(c102.52,33.53) 103.275,34.265 103.275,40.535 ccw(c102.52,41.27) 103.574,41.27 103.574,41.47 ccw(c102.52,41.47) 103.275,42.205 103.275,48.125 103.216,48.184 v1(102.05,49.35)
"cell 5 input +": "OP 300.3" R320.1 R322.2 | length 4.8
  Signal/Power1 w0.2: 87.22,40.67 87.45,40.9 87.987,40.9 88.037,40.95 R322.2 R320.1
"cell 5 input -": "OP 300.2" R316.1 R318.1 | length 5.9
  Signal/Power1 w0.2: 87.22,38.13 89.62,38.13 89.75,38 R316.1 R318.1@91.95,36.9
"cell 5 output": "OP 300.1" GND.5 R316.2 | length 45.9
  Signal/Power1 w0.2: 87.25,35.6 87.23,35.58 ; R316.2 87.41,35.4 87.23,35.58 ; GND.5 93.65,58.5 93.65,60.683 93.533,60.8 82.45,60.8 80.65,59 80.65,57.2 85.55,52.3 85.55,35.617 85.667,35.5 87.15,35.5 87.23,35.58
"cell 6 input +": "OP 300.5" R321.2 R323.2 | length 70.8
  Signal/Power1 w0.2: R323.2 R321.2 ; R321.2@46.85,6.5 46.85,8.5 52.45,14.1 52.45,23.1 56.95,27.6 65.825,27.6 68.499,24.926 73.765,24.926 74.004,25.165 74.004,30.323 72.45,31.877 72.45,42.8 72.86,43.21 79.28,43.21
"cell 6 input -": "OP 300.6" R317.1 R319.2 | length 5.2
  Signal/Power1 w0.2: R319.2 74.5,40.75 R317.1 79.2,40.75 79.28,40.67
"cell 6 output": "OP 300.7" GND.6 R317.2 | length 51.8
  Signal/Power1 w0.2: R317.2@76.75,39.2 76.75,38.247 76.867,38.13 79.28,38.13 ; 79.25,38 79.35,38.1 83.75,38.1 84.45,38.8 84.45,51.9 79.85,56.5 79.85,59.2 82.15,61.5 96.133,61.5 96.25,61.383 GND.6
gnd: 200.4 "OP 300.4" "OP 301.4" "OP 302.4" *.4 C101.1 C202.1 C203.2 C400.1 C402.1 C404.1 C406.1 C408.1 C410.1 C412.1 C414.1 Cell3.1 D400.A D401.A D402.A D403.A D404.A D405.A D406.A D407.A ESP32.1 GND.1@96.975,5.7 GND.8 R204.2 R205.2 R302.1 R303.2 R306.1 R307.1 R310.1 R311.1 R314.1 R315.1 R318.2 R319.1 R322.1 R323.1 Reset.2 T124.1 T124.2 T125.1 T125.2 T126.1 T126.2 T127.1 T127.2 T128.1 T128.2 T129.1 T129.2 T130.1 T130.2 T131.1 T131.2 T132.1 T132.2 T133.1 T133.2 T134.1 T134.2 T135.1 T135.2 T136.1 T136.2 T137.1 T137.2 XT101.N XT103.N | length 1.9
  Signal/Power1 w0.2: ESP32.1 70.425,77.975 v1(70.425,79.175)
Mosfet_High: ESP32.6
Mosfet_Low: ESP32.7
Net*200_5: 200.5 P201.1 R201.2 | length 48.4
  Signal/Power1 w0.2: v1(68.85,22.55) 69.675,22.55 71.104,21.121 71.104,16.896 71.75,16.25 77.225,16.25 78.4,17.425 78.4,20.075 78.475,20.15 200.5 ; R201.2 75.85,26.1 75.85,22.674 78.374,20.15
  Signal/Power2 w0.2: P201.1 53.99,31.967 63.457,22.5 v1@68.8,22.5
  Signal/Power2 w0.5: v1@68.8,22.5 v1(68.85,22.55)
Net*_5: *.5 P200.1 R200.2 | length 27.5
  Signal/Power1 w0.2: R200.2 66.95,51.6 67.75,50.8 67.75,50.017 67.867,49.9 *.5 ; P200.1 65.99,37.04 73.033,44.083 73.033,49.783 72.916,49.9 *.5@70.75,49.9
NetC203_1: C203.1 R206.1 Reset.1 | length 5.8
  Signal/Power1 w0.2: C203.1 49.75,41.95 R206.1@49.75,44.3 ; R206.1 53.05,44.3 Reset.1@53.15,44.4
NetD200_K: D200.K R204.1 | length 3.2
  Signal/Power1 w0.2: R204.1 54.875,51.325 57.825,51.325 D200.K@57.95,51.2
NetD201_K: D201.K R205.1 | length 2.3
  Signal/Power1 w0.2: D201.K 83.1,46.85 83.15,46.8 R205.1
Signal_GND: 200.2 *.2 ESP32.15 | length 3.3
  Signal/Power1 w0.5: v1(53.05,62.025) 53.258,62.025 54.033,62.8 55.6,62.8 ESP32.15
pads on no net: 200.3 200.6 *.3 *.6 ESP32.2 ESP32.3 ESP32.4 ESP32.5 ESP32.9 ESP32.10 ESP32.11 ESP32.12 ESP32.13 ESP32.14 ESP32.16 ESP32.17 ESP32.18 ESP32.21 ESP32.22
copper on no net: | length 373.3
  Signal/Power1 w0.254: 107.5,1.117 107.5,76.642 ccw(c103.442,76.642) 103.442,80.7 3.818,80.7 ccw(c3.818,76.632) -0.25,76.632 -0.25,1.5 ccw(c1.775,1.5) 1.775,-0.525 106.125,-0.525 ccw(c106.125,0.85) 107.5,0.85 107.5,1.4

## Polygon pours and split planes (outlines as drawn)
+12V_Load on Signal/Power2 "NONET_L-01_P-001" (solid, remove dead copper, pour order 0): 22.25,52.2 42.425,52.2 42.425,26.513 22.211,26.487
+24V_Load on Signal/Power2 "NONET_L-01_P-001" (solid, pour order 1): 22.25,24.025 22.375,24.15 42.325,24.15 42.325,-0.075 22.3,-0.075
gnd on Signal/Power1 "NONET_L-01_P-001" (solid, remove dead copper, pour order 2): 43.151,79.5 105.72,79.5 105.72,0.3 43.277,0.3
gnd on GND Power (split plane): 3.818,80.317 103.442,80.317 103.459,80.319 103.704,80.31 103.965,80.282 104.223,80.235 104.478,80.17 104.727,80.087 104.969,79.987 105.204,79.869 105.43,79.735 105.646,79.586 105.85,79.421 106.042,79.242 106.221,79.05 106.386,78.846 106.535,78.63 106.669,78.404 106.787,78.169 106.887,77.927 106.97,77.678 107.035,77.423 107.082,77.165 107.11,76.904 107.119,76.659 107.117,76.642 107.117,0.85 107.118,0.838 107.11,0.72 107.085,0.593 107.043,0.47 106.986,0.353 106.914,0.245 106.828,0.147 106.73,0.061 106.622,-0.011 106.505,-0.068 106.382,-0.11 106.255,-0.135 106.137,-0.143 106.125,-0.142 1.775,-0.142 1.762,-0.143 1.614,-0.136 1.454,-0.112 1.298,-0.073 1.146,-0.019 1,0.05 0.862,0.133 0.732,0.229 0.613,0.338 0.504,0.457 0.408,0.587 0.325,0.725 0.256,0.871 0.202,1.023 0.163,1.179 0.139,1.339 0.132,1.487 0.133,1.5 0.133,76.632 0.131,76.649 0.14,76.895 0.168,77.156 0.215,77.415 0.28,77.671 0.363,77.92 0.464,78.163 0.582,78.399 0.716,78.625 0.866,78.842 1.031,79.046 1.211,79.239 1.404,79.419 1.608,79.584 1.825,79.734 2.051,79.868 2.287,79.986 2.53,80.087 2.779,80.17 3.035,80.235 3.294,80.282 3.555,80.31 3.801,80.319
Signal_GND on GND Signal (split plane): 3.818,80.317 103.442,80.317 103.459,80.319 103.704,80.31 103.965,80.282 104.223,80.235 104.478,80.17 104.727,80.087 104.969,79.987 105.204,79.869 105.43,79.735 105.646,79.586 105.85,79.421 106.042,79.242 106.221,79.05 106.386,78.846 106.535,78.63 106.669,78.404 106.787,78.169 106.887,77.927 106.97,77.678 107.035,77.423 107.082,77.165 107.11,76.904 107.119,76.659 107.117,76.642 107.117,0.85 107.118,0.838 107.11,0.72 107.085,0.593 107.043,0.47 106.986,0.353 106.914,0.245 106.828,0.147 106.73,0.061 106.622,-0.011 106.505,-0.068 106.382,-0.11 106.255,-0.135 106.137,-0.143 106.125,-0.142 1.775,-0.142 1.762,-0.143 1.614,-0.136 1.454,-0.112 1.298,-0.073 1.146,-0.019 1,0.05 0.862,0.133 0.732,0.229 0.613,0.338 0.504,0.457 0.408,0.587 0.325,0.725 0.256,0.871 0.202,1.023 0.163,1.179 0.139,1.339 0.132,1.487 0.133,1.5 0.133,76.632 0.131,76.649 0.14,76.895 0.168,77.156 0.215,77.415 0.28,77.671 0.363,77.92 0.464,78.163 0.582,78.399 0.716,78.625 0.866,78.842 1.031,79.046 1.211,79.239 1.404,79.419 1.608,79.584 1.825,79.734 2.051,79.868 2.287,79.986 2.53,80.087 2.779,80.17 3.035,80.235 3.294,80.282 3.555,80.31 3.801,80.319

## Silkscreen, mask and mechanical layers (free items; w line width, h text height)
Top Overlay:
  lines w0.254: 1.25,1 21.75,1 21.75,48.75 1.25,48.75 1.25,1 ; 22.25,0 42.25,0 42.25,24 22.25,24 22.25,0 ; 22.25,26.5 42.35,26.5 42.35,52.3 22.25,52.3 22.25,26.5
  text "+5" at 99.55,63.2 h1 r90
  text "Cell1_OP" at 84.187,63.18 h0.8 r90
  text "Cell2_OP" at 86.937,63.18 h0.8 r90
  text "Cell3_OP" at 89.187,63.18 h0.8 r90
  text "Cell4_OP" at 91.687,63.18 h0.8 r90
  text "Cell5_OP" at 94.187,63.18 h0.8 r90
  text "Cell6_OP" at 96.937,63.18 h0.8 r90
  text "12V load" at 22.25,52.7 h1
  text "GND" at 1.2,49.2 h1
  text "24V load" at 22.35,24.4 h1
  text "GND" at 64.73,5.195 h0.8 r270
  text "Cell2" at 55.255,0.58 h0.8
  text "Cell1" at 59.405,0.555 h0.8

## Text inside footprints (layer, text, board x,y; h text height)
D200: Mechanical 13 "+" at 56.95,54.017 h1 r90
D201: Mechanical 13 "+" at 81.033,48.292 h0.5 r180